# EAGLE board DS3231 (EAGLE 5.11)
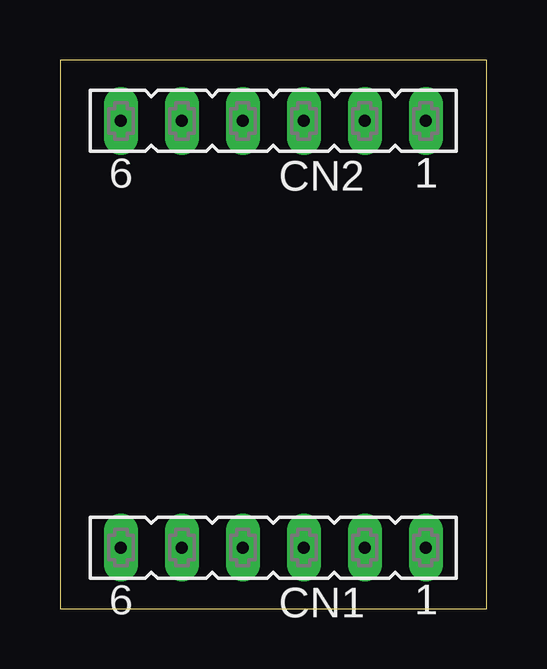
[diagram p0: board, top side]
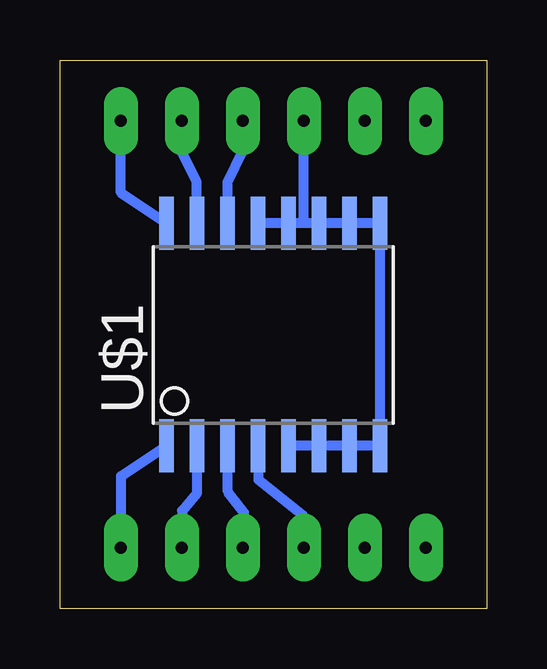
[diagram p1: board, bottom side, seen from below]

Size 17.78 x 22.86 mm. Coordinates in mm from the lower left corner, seen from the top.
Outline: 0,0 17.78,0 17.78,22.86 0,22.86 0,0
Copper layers (1*16): Top 0.035mm / dielectric 1.5mm / Bottom 0.035mm
Design rules "default": minimum track width 10mil, minimum drill 24mil, track to track 8mil, track to pad 8mil, pad to pad 8mil, via to via 8mil, smd to smd 8mil, copper to edge 40mil, drill to drill 8mil, minimum pad ring 10mil, minimum via ring 8mil, stop-mask expansion 4mil, vias tented up to drill 0mil, thermal gap 10mil

## Footprints (pad centres in the part's own frame; a part is rotated, then mirrored left to right if it is on the bottom)
CON-S6-1 = drill 0.5 pad 1.422 long: 1 -5.08,0; 2 -2.54,0; 3 0,0; 4 2.54,0; 5 5.08,0; 6 7.62,0
SO16L$ = smd 0.61 x 2.21: 1 -4.445,-4.636; 2 -3.175,-4.636; 3 -1.905,-4.636; 4 -0.635,-4.636; 5 0.635,-4.636; 6 1.905,-4.636; 7 3.175,-4.636; 8 4.445,-4.636; 9 4.445,4.636; 10 3.175,4.636; 11 1.905,4.636; 12 0.635,4.636; 13 -0.635,4.636; 14 -1.905,4.636; 15 -3.175,4.636; 16 -4.445,4.636

## Placement (x,y rotation side)
CN1  CON-S6-1  [CON-S6-1]  10.16,2.54 180 top
CN2  CON-S6-1  [CON-S6-1]  10.16,20.32 180 top
U$1  MAX-DS3231S  [SO16L$]  8.89,11.43 0 bottom

## Library data of the parts
CN1 CN2 = MyLib
U$1 = bant2

## Nets
GND: CN2.4 U$1.5 U$1.6 U$1.7 U$1.8 U$1.9 U$1.10 U$1.11 U$1.12 U$1.13
N$1: CN1.1 U$1.1
N$2: CN1.2 U$1.2
N$3: CN1.3 U$1.3
N$4: CN1.4 U$1.4
N$7: CN2.1 U$1.16
N$8: CN2.2 U$1.15
N$9: CN2.3 U$1.14

## Tracks (layer width: path | path; a pad name or v marks a point on that pad's centre or on a via)
GND
  Bottom 0.406: U$1.13 U$1.12 7.62,16.07 | 7.62,16.07 U$1.11 U$1.10 U$1.9 U$1.8 U$1.7 U$1.6 U$1.5 | 7.62,16.07 CN2.4
N$1
  Bottom 0.406: U$1.1 15.24,5.52 CN1.1
N$2
  Bottom 0.406: U$1.2 12.08,4.81 12.69,4.08 CN1.2
N$3
  Bottom 0.406: U$1.3 10.78,4.87 10.12,4.01 CN1.3
N$4
  Bottom 0.406: U$1.4 9.5,5.35 7.63,3.85 CN1.4
N$7
  Bottom 0.406: U$1.16 15.24,17.34 CN2.1
N$8
  Bottom 0.406: U$1.15 12.09,17.79 12.7,19.05 CN2.2
N$9
  Bottom 0.406: U$1.14 10.79,17.77 10.16,19.05 CN2.3